# Altium PCB pcb.PcbDoc
Units mm, origin at the board's own origin, x right, y up, seen from the top; angles counter-clockwise.
Board outline 18.5 x 39.5 mm, 2 copper layers (Top Layer, Bottom Layer); 24 components, 19 nets, 77 pads, 3 vias.
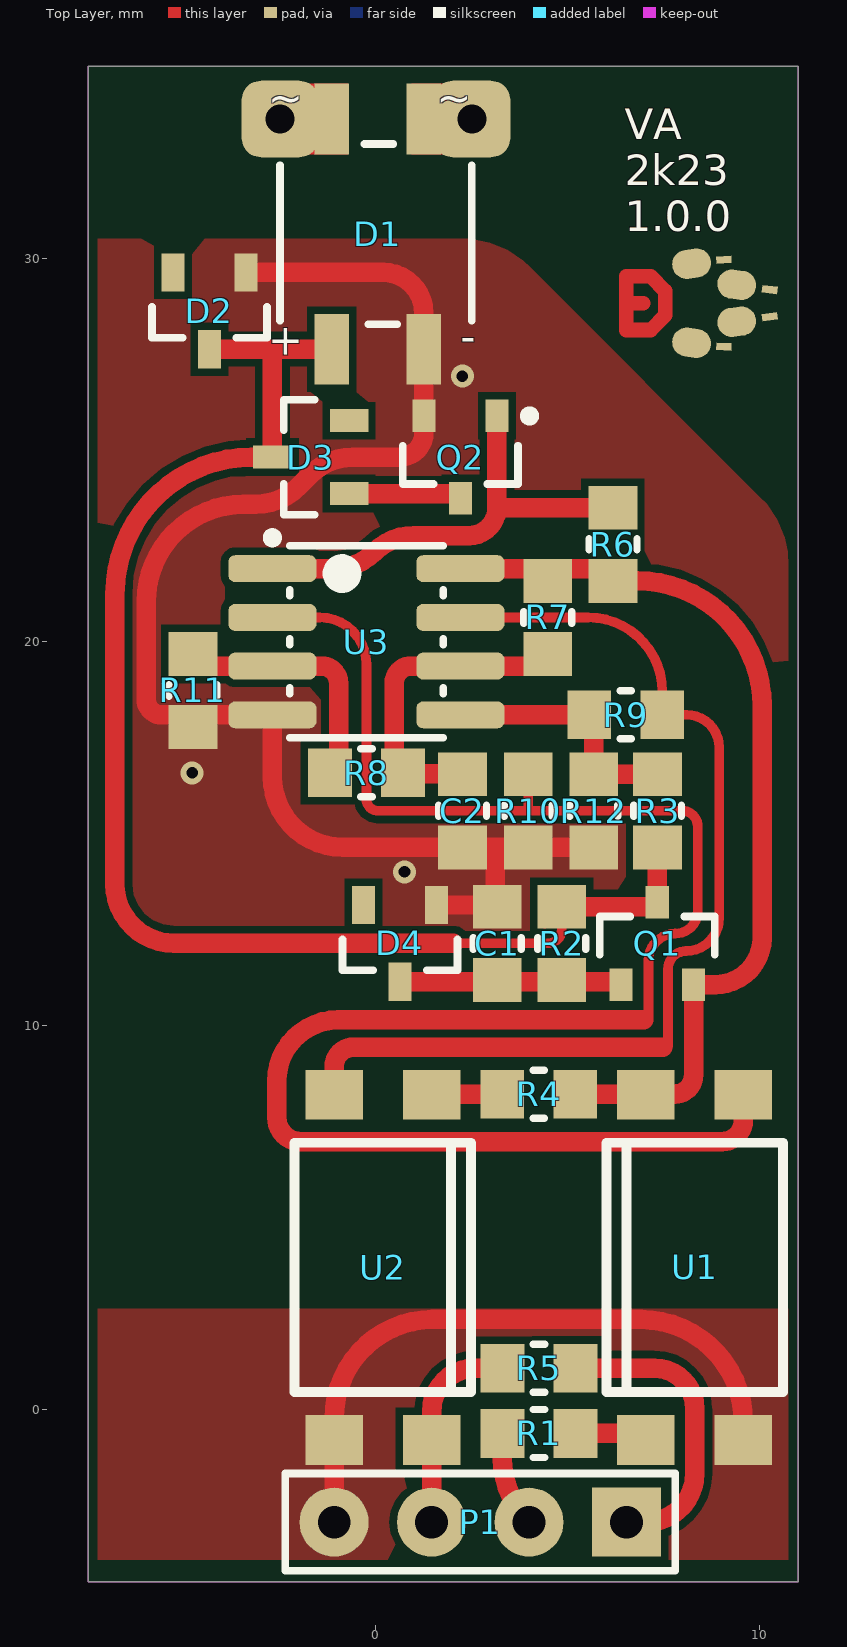
[diagram p0: Top Layer view]
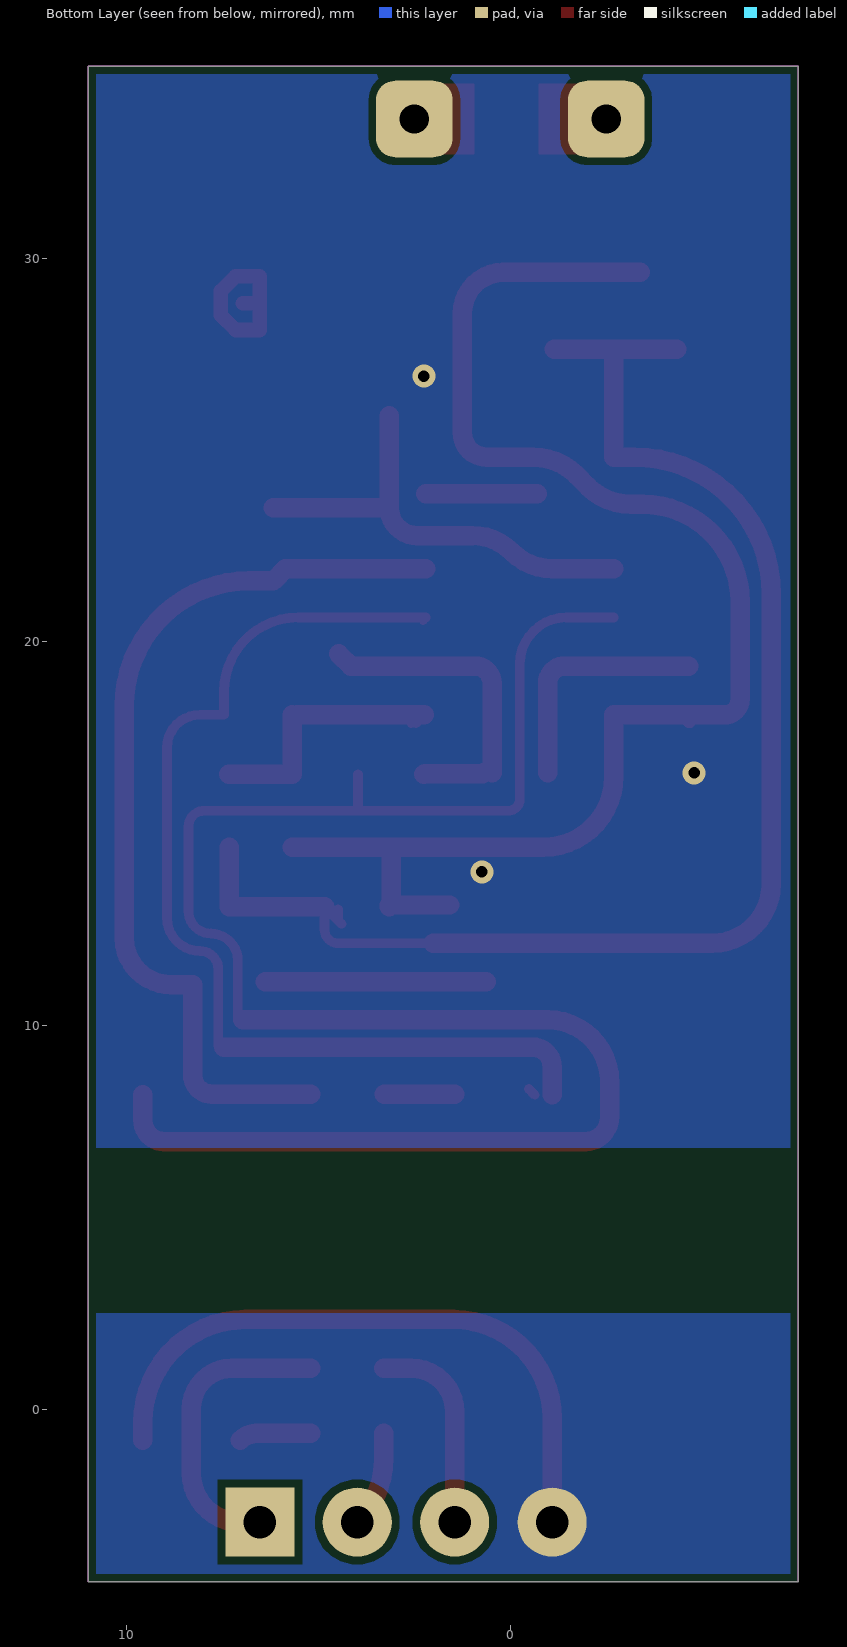
[diagram p1: Bottom Layer view, seen from below]
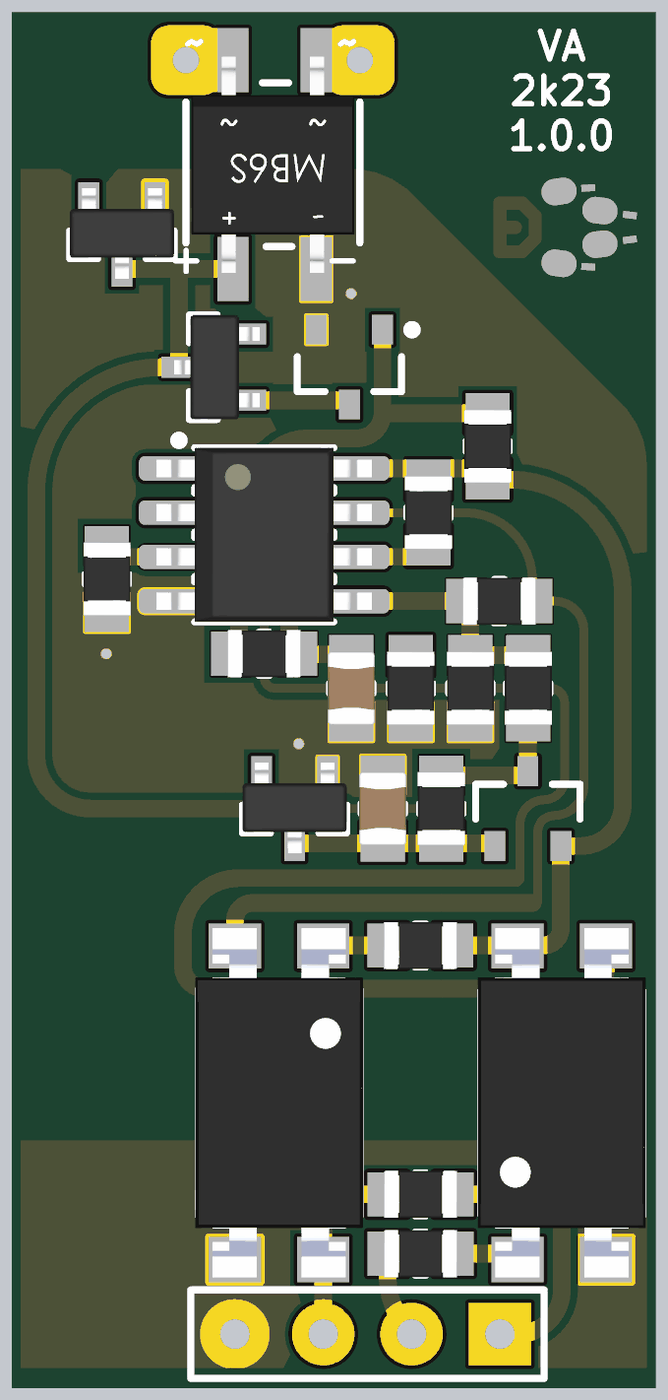
[diagram p2: 3D render of the assembled board from above, using the file's embedded part models]

## Layer stack, top to bottom
Top Solder: solder mask 0.0102, Solder Resist, Dk 3.5
Top Layer: signal copper 0.0356
Dielectric 1: dielectric 0.32, FR-4, Dk 4.8
Bottom Layer: signal copper 0.0356
Bottom Solder: solder mask 0.0102, Solder Resist, Dk 3.5

## Board outline
-7.5,-4.5 11,-4.5 11,35 -7.5,35

## Design rules (kind name [scope] priority, off if disabled: settings)
AcuteAngle [All] p1: minimum=6.00000000000000E+0001 checktracksonly=FALSE
Clearance [All] p1: gap=0.2 ignorepadtopadclearanceinfootprint=FALSE
MinimumSolderMaskSliver [All] p1 off: minsoldermaskwidth=0.254
PolygonConnect [All] p1: connectstyle=Direct reliefconductorwidth=0.254 reliefentries=4 polygonreliefangle="90 Angle" airgapwidth=0.254
RoutingVias [All] p1: holewidth=0.711 width=1.27 viastyle="Through Hole" minholewidth=0.2 minwidth=0.45 maxholewidth=0.711 maxwidth=5
SilkToSolderMaskClearance [IsPad] p1 off: minsilkscreentomaskgap=0.254 clearancetoexposedcopper=TRUE
SolderMaskExpansion [All] p1: expansion=0.102 istentingtop=FALSE
Width [All] p1: maxlimit=12.7 minlimit=0.191 preferedwidth=0.254
28 further rules are at their usual default settings.

## Components (designator, comment, footprint, x,y, rotation, side; value= is the part's Value field where it differs from the comment)
C1 "470nF" RC_0805_T0.8#1 3.159,12.139 r270 top
C2 "100nF" RC_0805_T0.8#2 2.254,15.593 r90 top
D1 "CDBHM160L-HF" RR_MBS 0,30.874 r180 top
D2 "24v" RR_SOT-23#1 -4.339,28.624 r270 top
D3 "7V5" RR_SOT-23#1 -1.7,24.811 r180 top
D4 "7V5" RR_SOT-23#2 0.625,12.139 r270 top
P1 "Header 4" HDR1X4 6.528,-2.946 r180 top
Q1 "BC817" SOT-23B_L#1 7.331,12.139 r90 top
Q2 "BC817" SOT-23B_L#2 2.2,24.811 r270 top
R1 "270" RR_0805#1 4.246,-0.635 r0 top
R2 "1k" RR_0805#2 4.841,12.139 r90 top
R3 "360k" RR_0805#3 7.34,15.593 r270 top
R4 "2k2" RR_0805#1 4.242,8.208 r180 top
R5 "10k" RR_0805#1 4.246,1.067 r180 top
R6 "2k2" RR_0805#1 6.176,22.54 r90 top
R7 "100k" RR_0805#1 4.474,20.635 r270 top
R8 "51k" RR_0805#3 -0.25,16.584 r180 top
R9 "1M5" RR_0805#3 6.509,18.095 r0 top
R10 "20k" RR_0805#2 3.966,15.593 r270 top
R11 "51k" RR_0805#3 -4.771,18.73 r270 top
R12 "100k" RR_0805#3 5.679,15.593 r270 top
U1 "PC-817" RR_DIP_SM4 8.306,3.693 r90 top
U2 "PC-817" RR_DIP_SM4 0.178,3.693 r270 top
U3 "LM2903" RR_SO-8 -0.25,20 r0 top

## Footprints (in the part's own frame and the unit in brackets; to place one, negate y for a bottom-side part, rotate by r counter-clockwise, add the part's x,y. Pads: shape width x height; smd on the part's side, far side on the other; paste and mask are expansions set on the pad)
HDR1X4 [mm] "Connector; Header; 4 Position"
  rect 1.8x1.8 hole 0.85: 1(0,0)
  round 1.8 hole 0.85: 2(2.54,0) 3(5.08,0) 4(7.62,0)
  silkscreen extent -1.27,-1.27 8.89,1.27
RC_0805_T0.8#1 [mil] "Chip Capacitor"
  rect 45x50 smd mask+1.97: 1(-37.5,0)
  rect 45x50 smd: 2(37.5,0)
  silkscreen extent -6,-25 6,25, body extent -41,-27 41,27, height 22
RC_0805_T0.8#2 [mil] "Chip Capacitor"
  rect 45x50 smd mask+1.97: 1(-37.5,0) 2(37.5,0)
  silkscreen extent -6,-25 6,25, body extent -41,-27 41,27, height 22
RR_0805#1 [mil] "Chip Resistor; Body 1.6 x 0.8 mm (LxW typ)"
  rect 45x50 smd: 1(-37.5,0) 2(37.5,0)
  silkscreen extent -6,-25 6,25, body extent -41,-27 41,27, height 24
RR_0805#2 [mil] "Chip Resistor; Body 1.6 x 0.8 mm (LxW typ)"
  rect 45x50 smd: 1(-37.5,0)
  rect 45x50 smd mask+1.97: 2(37.5,0)
  silkscreen extent -6,-25 6,25, body extent -41,-27 41,27, height 24
RR_0805#3 [mil] "Chip Resistor; Body 1.6 x 0.8 mm (LxW typ)"
  rect 45x50 smd mask+1.97: 1(-37.5,0) 2(37.5,0)
  silkscreen extent -6,-25 6,25, body extent -41,-27 41,27, height 24
RR_DIP_SM4 [mm]
  rect 1.3x1.5 smd: 1(-4.5,1.27) 2(-4.5,-1.27) 3(4.5,-1.27) 4(4.5,1.27)
  silkscreen extent -3.25,-2.3 3.25,2.3, body extent -5.01,-2.42 5.02,2.42, height 3.9
RR_MBS [mm]
  rect 0.9x1.84 smd: 1(1.15,3.25) 3(-1.25,-2.75) 4(1.15,-2.75)
  rect 0.9x1.84 smd mask+0.05: 2(-1.25,3.25)
  silkscreen extent -2.5,-2.1 2.5,2.6, body extent -2.35,-2.85 2.35,3.35, height 1.75
RR_SO-8 [mm] "SOIC, 8-Leads, Body 4.9x3.9mm, Pitch 1.27mm, IPC Low Density"
  rrect50% 2.3x0.7 smd: 1(-2.45,1.905) 2(-2.45,0.635) 5(2.45,-1.905) 6(2.45,-0.635) 7(2.45,0.635) 8(2.45,1.905)
  rrect50% 2.3x0.7 smd mask+0.05: 3(-2.45,-0.635) 4(-2.45,-1.905)
  silkscreen extent -2.57,-2.5 2,2.83, body extent -3.1,-2.5 3.1,2.5, height 1.75
RR_SOT-23#1 [mm] "SOT23, 3-Leads, Body 2.9x1.3mm, Pitch 0.95mm, Lead Span 2.3mm, IPC High Density"
  rect 1x0.6 smd: 1(-1,0.95) 2(-1,-0.95) 3(1,0)
  silkscreen extent -0.1,-1.5 0.7,1.5, body extent -1.33,-1.5 1.27,1.5, height 1.1
RR_SOT-23#2 [mm] "SOT23, 3-Leads, Body 2.9x1.3mm, Pitch 0.95mm, Lead Span 2.3mm, IPC High Density"
  rect 1x0.6 smd mask+0.05: 1(-1,0.95)
  rect 1x0.6 smd: 2(-1,-0.95) 3(1,0)
  silkscreen extent -0.1,-1.5 0.7,1.5, body extent -1.33,-1.5 1.27,1.5, height 1.1
SOT-23B_L#1 [mm] "SOT23, 3-Leads, Body 2.9x1.3mm, Pitch 0.95mm, Lead Span 2.4mm, IPC High Density"
  rect 0.85x0.6 smd: 1(-1.075,0.95) 2(-1.075,-0.95) 3(1.075,0)
  silkscreen extent -0.3,-1.5 0.7,1.5, body extent -0.7,-1.5 0.7,1.5, height 1.14
SOT-23B_L#2 [mm] "SOT23, 3-Leads, Body 2.9x1.3mm, Pitch 0.95mm, Lead Span 2.4mm, IPC High Density"
  rect 0.85x0.6 smd: 1(-1.075,0.95) 3(1.075,0)
  rect 0.85x0.6 smd mask+0.05: 2(-1.075,-0.95)
  silkscreen extent -1.2,-1.5 0.7,1.93, body extent -0.7,-1.5 0.7,1.5, height 1.14

## Part data
C1: library part Cap, "470nF 0805"
C2: library part Cap, "100nF 0805"
D2: library part BZX84, "Zener 24v SOT-23"
D3 D4: library part BZX84, "Zener 7V5 SOT-23"
P1: "Header, 4-Pin"
Q1 Q2: library part NPN_SOT23
R1: library part Res1, "270 0805"
R2: library part Res1, "1k 0805"
R3: library part Res1, "360k 0805"
R4 R6: library part Res1, "2k2 0805"
R5: library part Res1, "10k 0805"
R7 R12: library part Res1, "100k 0805"
R8 R11: library part Res1, "51k 0805"
R9: library part Res1, "1M5 0805"
R10: library part Res1, "20k 0805"
U1 U2: library part Optoisolator1
U3: library part LM393ADR

## Free pads (board coordinates)
  rrect50% 2x2 hole 0.762: A(2.5,33.624) B(-2.5,33.624)
  oval 0.762x1.016 smd rot 82 mask+0.102: ""(8.227,27.794)
  oval 0.762x1.016 smd rot 98 mask+0.102: ""(8.227,29.854)
  rect 0.4x0.2 smd rot 177 mask+0.102: ""(9.065,27.692)
  rect 0.4x0.2 smd rot 3 mask+0.102: ""(9.065,29.955)
  oval 0.762x1.016 smd rot 97 mask+0.102: ""(9.402,28.341)
  oval 0.762x1.016 smd rot 83 mask+0.102: ""(9.402,29.306)
  rect 0.4x0.2 smd rot 7 mask+0.102: ""(10.263,28.47)
  rect 0.4x0.2 smd rot 173 mask+0.102: ""(10.263,29.177)

## Via types
v1: diameter 0.6, hole 0.3, Top Layer to Bottom Layer, tented both sides, 3 vias

## Nets (pads, with @x,y where several pads share a name; then routed paths per layer and width w, separated by ;. In a path a pad name is that pad's centre, name@x,y a point inside that pad or via, vN(x,y) a via of type N, cw(c..) or ccw(c..) an arc to the next point about the centre after c; other vN are vias at no path point)
5V_L: P1.1 R5.1 | length 7.9
  Top Layer w0.508: R5.1 7.256,1.067 cw(c7.256,0.013) 8.31,0.013 8.31,-1.676 cw(c7.04,-1.676) 7.04,-2.946 P1.1
A: D1.3 pad.A
B: D1.4 pad.B
GND: C1.1 C2.1 D1.2 D2.1 D4.1 Q2.2 R10.2 R11.2 R12.2 U3.4 | length 38.6
  Top Layer w0.254: R11.2@-4.568,17.943 -4.53,17.981 R11.2@-4.568,17.981 ; R11.2@-4.568,17.943 -4.632,17.879 -4.695,17.879 -4.695,17.981 R11.2@-4.568,17.981 ; R11.2@-4.568,17.943 R11.2@-4.568,17.981
  Top Layer w0.508: D2.1 0.186,29.624 cw(c0.186,28.56) 1.25,28.56 D1.2 Q2.2 1.25,25.446 cw(c0.615,25.446) 0.615,24.811 -0.595,24.811 ccw(c-0.595,23.215) -1.723,24.344 -2.018,24.049 cw(c-3.146,25.176) -3.146,23.582 -3.45,23.582 ccw(c-3.45,21.042) -5.239,22.845 ccw(c-3.45,21.042) -5.99,21.042 -5.99,18.502 ccw(c-5.584,18.502) -5.584,18.095 U3.4 -2.7,16.481 ccw(c-0.86,16.481) -0.86,14.641 C2.1 3.052,14.641 ; D4.1 C1.1@3.108,13.139 ; 3.108,14.534 C1.1@3.108,13.139 ; C1.1 3.159,13.139 C1.1@3.108,13.139 ; 3.159,14.534 3.052,14.641 ; R12.2 R10.2 3.052,14.641
  other v1: 0.743,14 -4.789,16.584 2.25,26.924
LGND: P1.4 U1.2 U2.3 | length 16.8
  Top Layer w0.508: P1.4 U2.3 -1.092,-0.241 cw(c1.486,-0.241) 1.486,2.337 6.897,2.337 cw(c6.897,-0.342) 9.576,-0.342 U1.2
NetC1_2: C1.2 D4.3 Q1.1 R2.1 | length 5.8
  Top Layer w0.508: D4.3 Q1.1@6.381,11.139
NetC2_2: C2.2 R7.2 R8.1 U3.6 | length 8.3
  Top Layer w0.508: R8.1@0.474,16.584 0.474,18.921 cw(c0.918,18.921) 0.918,19.365 U3.6 4.157,19.365 R7.2 ; R8.1 0.721,16.565 2.235,16.565 C2.2
NetD1_1: D1.1 D2.3 D3.3 Q1.3 R2.2 R3.2 | length 38.2
  Top Layer w0.254: 2.011,12.139 4.48,12.139 ccw(c4.48,12.5) 4.841,12.5 R2.2@4.841,12.939 ; R2.2@4.397,12.647 R2.2@4.486,12.736 ; R2.2@4.486,13.028 R2.2@4.486,12.736 ; R2.2@5.015,13.112 4.994,13.091 R2.2@4.841,12.939 ; R2.2@4.486,12.736 R2.2 R2.2@4.841,12.939
  Top Layer w0.508: D2.3 -2.7,27.624 ; D1.1 -2.7,27.624 ; 2.011,12.139 -5.257,12.139 cw(c-5.257,13.685) -6.803,13.685 -6.803,21.241 cw(c-3.234,21.241) -3.234,24.811 D3.3 -2.7,27.624 ; R2.2 4.994,13.091 7.331,13.091 Q1.3 R3.2@7.331,14.641
NetD3_1: D3.1 Q2.3 | length 2.9
  Top Layer w0.508: D3.1 Q2.3@2.2,23.861
NetQ1_2: Q1.2 R4.1 R6.1 R7.1 U1.4 U3.8 | length 24.2
  Top Layer w0.254: Q1.2@8.179,10.962 Q1.2
  Top Layer w0.508: U3.8 5.859,21.905 R6.1 6.802,21.588 cw(c6.802,18.327) 10.062,18.327 10.062,12.279 cw(c8.848,12.279) 9.293,11.148 cw(c8.848,12.279) 8.848,11.064 Q1.2 8.281,8.713 cw(c7.776,8.713) 7.776,8.208 R4.1
NetQ2_1: Q2.1 R6.2 U3.1 | length 12
  Top Layer w0.508: U3.1 -1.089,21.905 ccw(c-1.089,23.379) -0.048,22.336 ; -0.046,22.338 cw(c0.996,21.295) 0.996,22.769 2.43,22.769 ccw(c2.43,23.493) 3.15,23.421 ; Q2.1 3.15,23.421 ; R6.2 3.154,23.493 cw(c2.43,23.493) 3.15,23.421
NetR1_2: R1.2 U1.1 | length 1.9
  Top Layer w0.508: R1.2 6.622,-0.635 cw(c6.622,-1.221) U1.1
NetR3_1: R3.1 R9.1 R12.1 U3.5 | length 7.1
  Top Layer w0.254: U3.5 2.236,18.095 U3.5@2.455,17.876 ; U3.5@2.582,17.876 U3.5@2.582,18.095
  Top Layer w0.508: U3.5@2.236,18.095 2.582,18.095 R9.1 ; R9.1@5.679,18.095 R12.1 R3.1
NetR4_2: R4.2 U2.1 | length 1.8
  Top Layer w0.508: U2.1@1.448,8.208 R4.2
NetR8_2: R8.2 R11.1 U3.3 | length 6.3
  Top Layer w0.508: R11.1@-4.657,19.365 U3.3 -1.418,19.365 cw(c-1.418,18.921) -0.974,18.921 R8.2@-0.974,16.584
NetR9_2: R9.2 U2.2 U3.7 | length 27.4
  Top Layer w0.254: U2.2@-0.635,8.193 U2.2@-0.482,8.346 ; U3.7@2.269,20.566 U3.7 5.53,20.635 cw(c5.53,18.703) 7.462,18.703 R9.2 8.096,18.095 cw(c8.096,17.246) 8.945,17.246 8.945,12.802 cw(c8.081,12.802) 8.081,11.939 ccw(c8.081,11.468) 7.61,11.468 7.61,9.459
  Top Layer w0.508: U2.2 -1.092,8.926 cw(c-0.584,8.926) -0.584,9.434 7.472,9.434
NetR10_1: R10.1 U1.3 U3.2 | length 47.3
  Top Layer w0.254: U3.2 -1.464,20.635 cw(c-1.464,19.421) -0.25,19.421 -0.25,15.898 ccw(c0.055,15.898) 0.055,15.593 3.966,15.593 ; R10.1 3.966,15.593 ; 7.1,10.234 7.1,11.692 cw(c7.802,11.692) 7.802,12.393 ccw(c7.802,12.977) 8.386,12.977 8.386,15.187 ccw(c7.98,15.187) 7.98,15.593 3.966,15.593
  Top Layer w0.508: 6.976,10.145 -0.985,10.145 ccw(c-0.985,8.543) -2.587,8.543 -2.587,7.605 ccw(c-1.952,7.605) -1.952,6.97 9.017,6.97 ccw(c9.017,7.529) 9.576,7.529 U1.3
RXD: P1.3 R5.2 U2.4 | length 5.4
  Top Layer w0.508: P1.3 U2.4 1.448,-0.066 cw(c2.581,-0.066) 2.581,1.067 R5.2
TXD: P1.2 R1.1 | length 2.5
  Top Layer w0.508: R1.1 3.293,-1.269 ccw(c5.665,-1.269) P1.2
pads on no net: D2.2 D3.2 D4.2
copper on no net: | length 4.8
  Top Layer w0.381: 6.525,28.824 6.97,28.824 ; 6.525,28.125 6.525,29.522 7.16,29.522 7.541,29.141 7.541,28.506 7.16,28.125 6.525,28.125

## Polygon pours and split planes (outlines as drawn)
GND on Top Layer "GND_L01_P000" (solid, remove dead copper, pour order 0): -0.5,30.5 2.224,30.5 cw(c2.224,27.96) 4.02,29.756 10.006,23.77 cw(c8.21,21.974) 10.75,21.974 10.75,19.5 10.75,8.5 cw(c8.75,8.5) 8.75,6.5 -4.71,6.5 cw(c-4.71,9.04) -7.25,9.04 -7.25,30.5
LGND on Top Layer "LGND_L01_P002" (solid, remove dead copper, pour order 2): -7.25,-3.923 -7.25,2.616 10.75,2.616 10.75,-3.923
LGND on Bottom Layer "NONET_L02_P-001" (solid, remove dead copper, pour order 4): -7.889,2.5 -7.889,-5.107 11.886,-5.107 11.886,2.5
GND on Bottom Layer "NONET_L02_P-001" (solid, remove dead copper, pour order 3): -8,36 -8,6.813 11.775,6.813 11.775,36

## Keep-outs
Keep-Out Layer:
  lines w0: -7.5,-4.5 -7.5,22.5 -7.5,35 11,35 11,-4.5 -7.5,-4.5

## Other copper
Top Layer:
  region net A: 2.929,34.544 0.929,34.544 0.929,32.704 2.929,32.704
  rectangle net B: -2.729,32.704 -0.729,34.544

## Silkscreen, mask and mechanical layers (free items; w line width, h text height)
Top Overlay:
  text "VA / 2k23 / 1.0.0" at 6.484,30.7 h0.8

## Text inside footprints (layer, text, board x,y; h text height)
D1: Top Overlay "+" at -1.9,28.174 h0.8 r180; Top Overlay "-" at 2.6,28.174 h0.8 r180; Top Overlay "~" at -1.9,34.474 h0.8 r180; Top Overlay "~" at 2.5,34.474 h0.8 r180